# Altium PCB mother_asserv_robinch.PcbDoc
Units mm, origin at the board's own origin, x right, y up, seen from the top; angles counter-clockwise.
Board outline 79.38 x 49.78 mm, 2 copper layers (Top Layer, Bottom Layer); 57 components, 47 nets, 223 pads, 6 vias.
Unrouted connection lines stored in the file: 5.
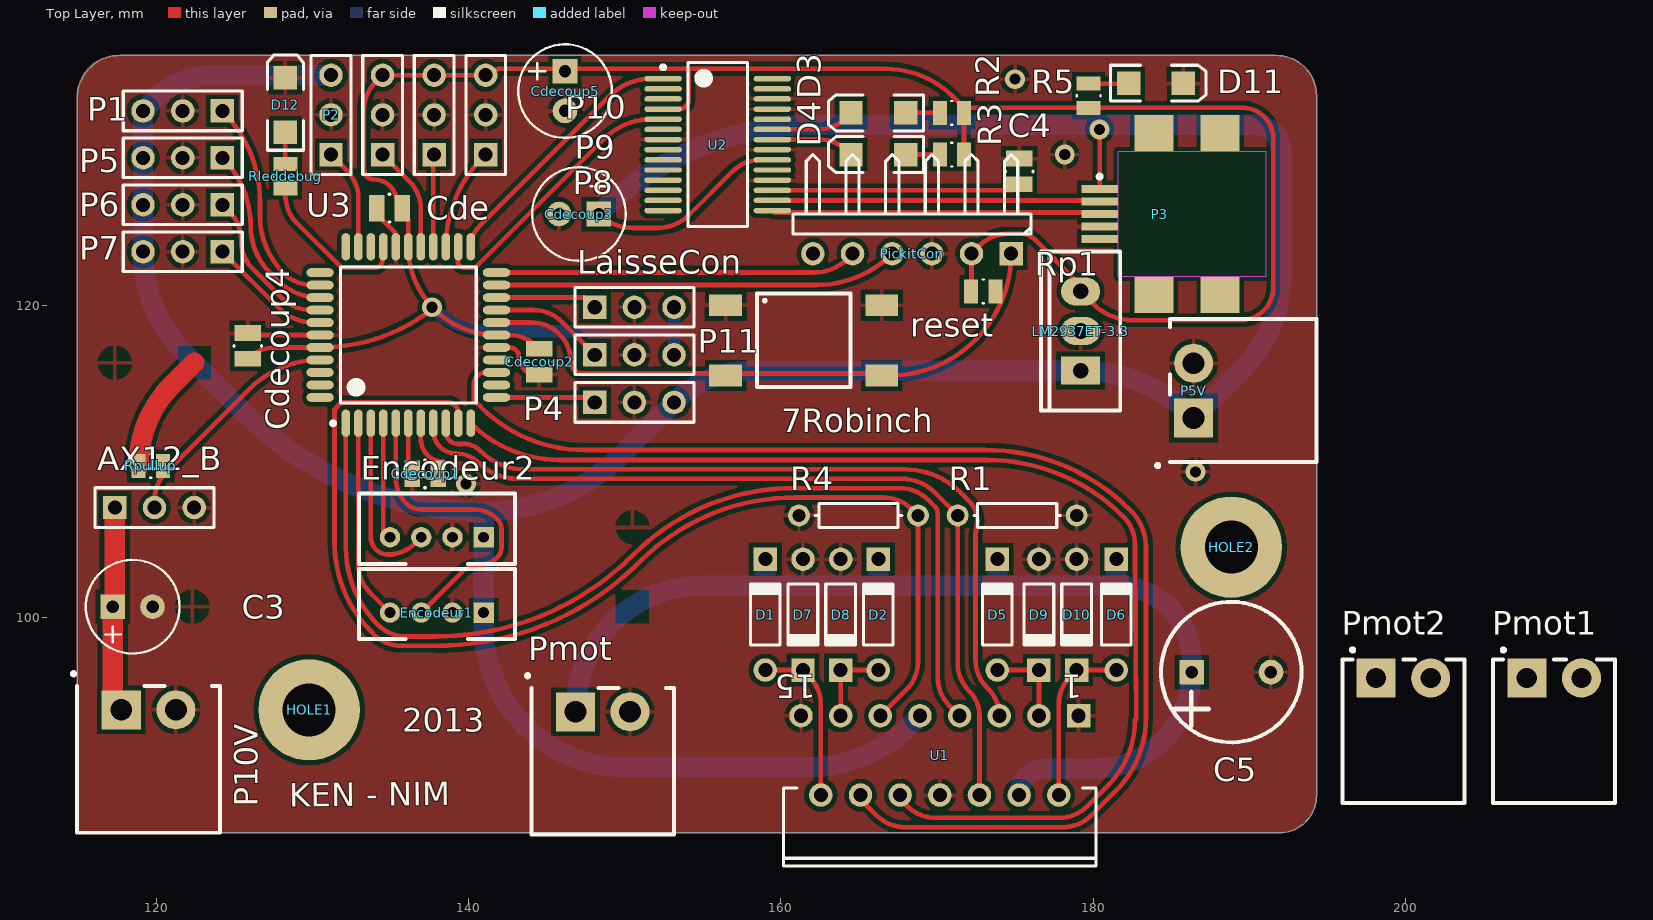
[diagram p0: Top Layer view]
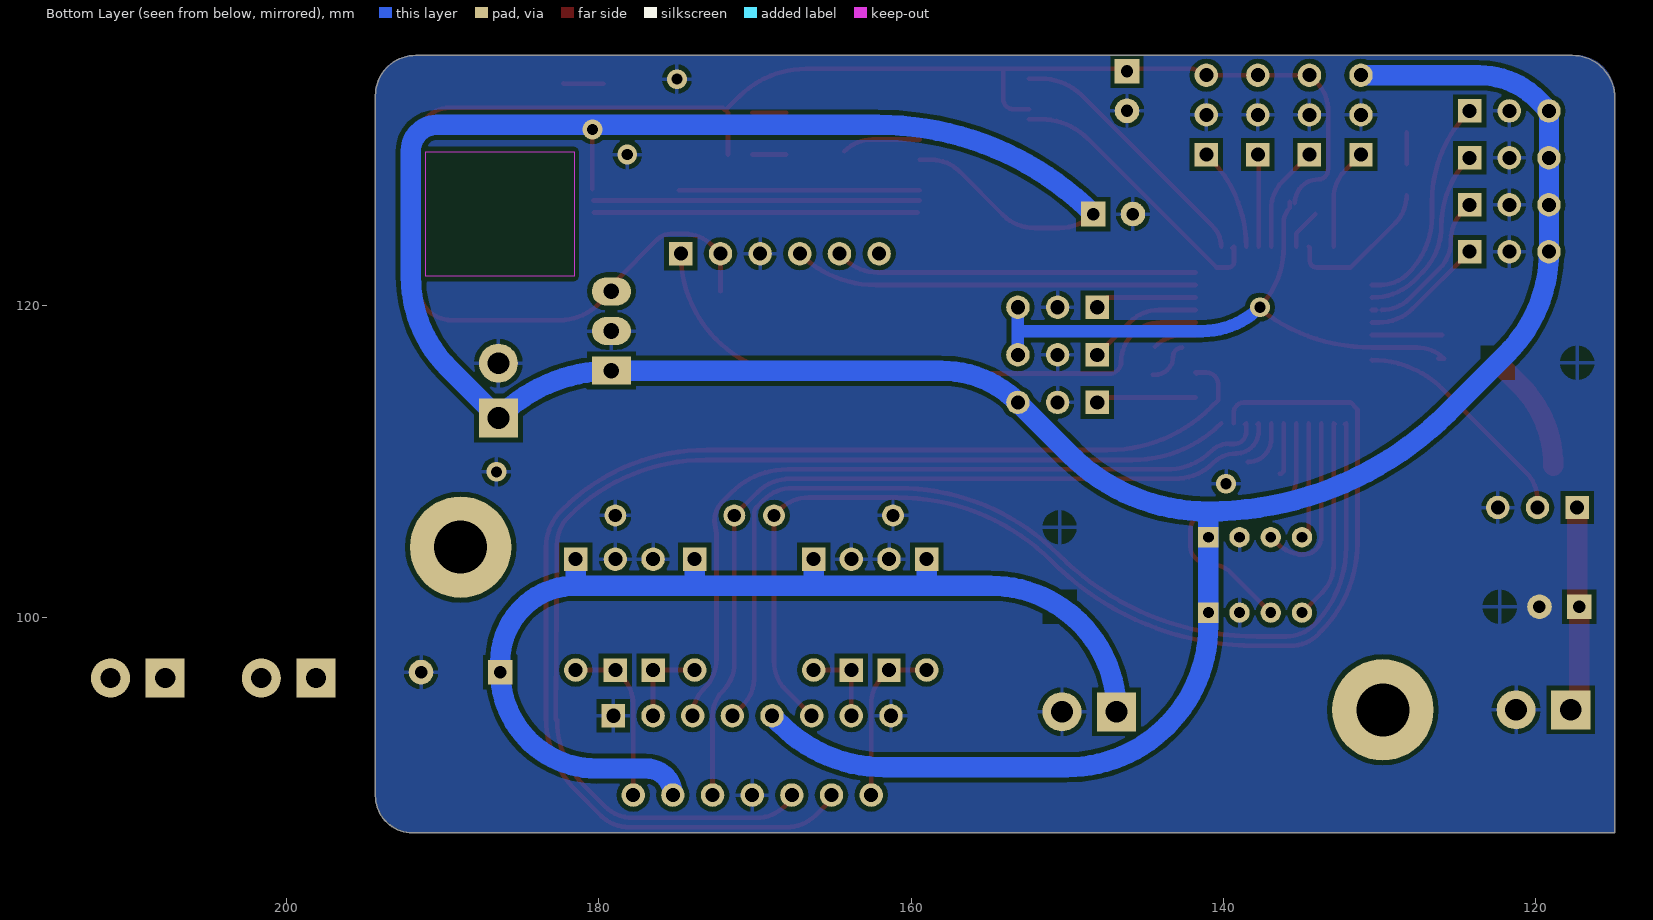
[diagram p1: Bottom Layer view, seen from below]

## Layer stack, top to bottom
Top Layer: signal copper 0.0356
Dielectric: dielectric 0.32, FR-4, Dk 4.8
Bottom Layer: signal copper 0.0356

## Board outline
114.935,86.233 191.929,86.233 ccw(c191.929,88.614) 194.31,88.614 194.31,133.43 ccw(c191.723,133.43) 191.723,136.017 117.664,136.017 ccw(c117.664,133.288) 114.935,133.288

## Design rules (kind name [scope] priority, off if disabled: settings)
Clearance [All] p1: gap=0.3
HoleSize [All] p1: absolutevalues=TRUE maxlimit=25.4 minlimit=0.025 maxpercent=80.000 minpercent=20.000
PolygonConnect [All] p1: connectstyle=Relief reliefconductorwidth=0.254 reliefentries=4 polygonreliefangle="90 Angle"
RoomDefinition motherpetit [InComponentClass('motherpetit')] p1: confinementstyle=ConfineIn formatcopy=TRUE lockcomponents=FALSE outline 0,0 50.8,0 50.8,25.4 0,25.4
RoomDefinition Hbridge [InComponentClass('Hbridge')] p2: confinementstyle=ConfineIn formatcopy=TRUE lockcomponents=FALSE outline 195.453,87.884 213.868,87.884 213.868,100.838 195.453,100.838
RoutingVias [All] p1: holewidth=0.6 width=1 viastyle="Through Hole" minholewidth=0.711 minwidth=1.27 maxholewidth=0.711 maxwidth=1.27
SilkscreenOverComponentPads [All] p1: minsilkscreentomaskgap=0.254
SolderMaskExpansion [All] p1: expansion=0.102
Width [All] p1: maxlimit=1.3 minlimit=0.3 preferedwidth=1.3 toplayer_prefwidth=0.3 minimp=50.000000 maximp=50.000000 favimp=50.000000
26 further rules are at their usual default settings.

## Classes and differential pairs
component class motherpetit: AX12_B C4 Cde Cdecoup1 Cdecoup2 Cdecoup3 Cdecoup4 Cdecoup5 D3 D4 D11 D12 Encodeur1 Encodeur2 HOLE1 HOLE2 LaisseCon LM2937ET-3.3 P1 P2 P3 P4 P5 P6 P7 P8 P9 P10 P11 PickitCon R2 R3 R5 reset Rleddebug Rp1 Rpullup U2 U3
component class Hbridge: C3 C5 D1 D2 D5 D6 D7 D8 D9 D10 P5V P10V Pmot Pmot1 Pmot2 R1 R4 U1

## Components (designator, comment, footprint, x,y, rotation, side; value= is the part's Value field where it differs from the comment)
AX12_B "Header 3" HDR1X3 117.348,107.061 r0 top
C3 "CAP Pol" RB.1/.3 117.221,100.711 r180 top
C4 "" C0805C 175.26,129.413 r270 top
C5 "CAP Pol" RB.2/.4 186.309,96.52 r180 top
Cde "CAP" C0805C 134.112,126.238 r0 top
Cdecoup1 "CAP" C0805C 136.398,109.22 r0 top
Cdecoup2 "CAP" C0805C 144.526,115.57 r90 top
Cdecoup3 "CAP Pol" RB.1/.3 148.336,125.857 r0 top
Cdecoup4 "CAP" C0805C 125.857,118.237 r270 top
Cdecoup5 "CAP Pol" RB.1/.3 146.177,135.001 r90 top
D1 "Diode 1N914" DO-35 159.004,100.203 r90 top
D2 "Diode 1N914" DO-35 166.243,100.203 r90 top
D3 "LED2" LED1206Y 166.243,132.334 r180 top
D4 "LED2" LED1206Y 166.243,129.667 r180 top
D5 "Diode 1N914" DO-35 173.863,100.203 r90 top
D6 "Diode 1N914" DO-35 181.483,100.203 r90 top
D7 "Diode 1N914" DO-35 161.417,100.203 r270 top
D8 "Diode 1N914" DO-35 163.83,100.203 r270 top
D9 "Diode 1N914" DO-35 176.53,100.203 r270 top
D10 "Diode 1N914" DO-35 178.943,100.203 r270 top
D11 "LED" LED1206R 184.023,134.239 r0 top
D12 "LED" LED1206G 128.27,132.842 r90 top
Encodeur1 "JST" B4B-PH-K-S 140.97,100.33 r180 top
Encodeur2 "JST" B4B-PH-K-S 140.97,105.156 r180 top
HOLE1 "Hole" SCREW 129.794,94.107 r0 top
HOLE2 "Hole" SCREW 188.849,104.521 r0 top
LaisseCon "Header 3" HDR1X3 148.082,119.888 r0 top
LM2937ET-3.3 "LM2937ET-3.3" TO-220V 179.197,115.824 r180 top
P1 "Header 3" HDR1X3 124.233,132.461 r180 top
P2 "Header 3" HDR1X3 131.191,129.667 r90 top
P3 "USB" USB/SM0.8-4H5 184.277,125.857 r0 top
P4 "Header 3" HDR1X3 148.082,113.792 r0 top
P5 "Header 3" HDR1X3 124.233,129.455 r180 top
P5V "Header 2" "Bornier male coude 2 voies" 186.436,114.554 r90 top
P6 "Header 3" HDR1X3 124.233,126.45 r180 top
P7 "Header 3" HDR1X3 124.233,123.444 r180 top
P8 "Header 3" HDR1X3 141.097,129.667 r90 top
P9 "Header 3" HDR1X3 137.795,129.667 r90 top
P10 "Header 3" HDR1X3 134.493,129.667 r90 top
P10V "Header 2" "Bornier male coude 2 voies" 119.507,94.107 r0 top
P11 "Header 3" HDR1X3 148.082,116.84 r0 top
PickitCon "PICkit" HDR1X6H 174.752,123.317 r180 top
Pmot "Header 2" "Bornier male coude 2 voies" 148.59,93.98 r0 top
Pmot1 "Header 2" TERM2W-3.5 207.772,96.139 r0 top
Pmot2 "Header 2" TERM2W-3.5 198.12,96.139 r0 top
R1 "Res1" AXIAL-0.3 175.133,106.553 r180 top
R2 "" C0805R 170.18,132.334 r0 top
R3 "" C0805R 170.18,129.667 r0 top
R4 "Res1" AXIAL-0.3 164.973,106.553 r0 top
R5 "RES" C0805R 179.705,132.657 r90 top
reset "SPST-NO" SPST-NO 156.464,120.015 r270 top
Rleddebug "" C0805R 128.27,127.508 r90 top
Rp1 "RES" C0805R 173.736,120.904 r180 top
Rpullup "RES" C0805R 118.872,109.728 r0 top
U1 "L298N" Multiwatt15V 170.18,91.186 r180 top
U2 "FT232RL" SSOP-28_M 155.956,130.302 r0 top
U3 "dsPIC33FJ64MC804-I/PT" TQFP-PT44_N 136.144,118.11 r90 top

## Footprints (in the part's own frame and the unit in brackets; to place one, negate y for a bottom-side part, rotate by r counter-clockwise, add the part's x,y. Pads: shape width x height; smd on the part's side, far side on the other; paste and mask are expansions set on the pad)
AXIAL-0.3 [mm] "Axial Device, Thru-Hole; 2 Leads; 0.3 in Pin Spacing"
  round 1.4 hole 0.85: 1(-3.81,0) 2(3.81,0)
  silkscreen extent -2.77,-0.76 2.77,0.76
B4B-PH-K-S [mm] "JST Header 4 pins Straight"
  rect 1.3x1.3 hole 0.7: 1(0,0)
  round 1.3 hole 0.7: 2(2,0) 3(4,0) 4(6,0)
  silkscreen extent -2,-2.8 8,1.7, body extent -1.95,-2.8 7.95,1.7, height 6
"Bornier male coude 2 voies" [mm] "Bornier male coude 2 voies 12A. Pas 5mm (model : CTB9350/2A) -- 3D FAUSSE"
  rect 2.5x2.5 hole 1.4: 1(-1.75,0)
  round 2.5 hole 1.4: 2(1.75,0)
  silkscreen extent -4.9,-7.87 4.57,2.41, body extent -4.2,-7.93 4.2,1.27, height 7.25
C0805C [mm]
  rect 1x1.7 smd: 1(0,0) 2(1.65,0)
  silkscreen extent 0.8,-0.89 0.85,0.89, body extent -0.21,-0.61 1.79,0.64, height 0.78
C0805R [mm]
  rect 0.9x1.55 smd: 1(0,0) 2(1.55,0)
  silkscreen extent 0.73,-0.76 0.81,0.76, body extent -0.24,-0.62 1.76,0.63, height 0.78
DO-35 [mm] "Diode, Axial; Body 3.8 x 1.9 mm (LxDia. max), Lead Dia. 0.53 mm (max)"
  round 1.5 hole 0.9: 1(-3.55,0)
  rect 1.5x1.5 hole 0.9: 2(3.55,0)
  silkscreen extent -1.95,-0.95 2.05,0.95
HDR1X3 [mm] "Connector; Header; 3 Position"
  rect 1.5x1.5 hole 0.9: 1(0,0)
  round 1.5 hole 0.9: 2(2.54,0) 3(5.08,0)
  silkscreen extent -1.27,-1.27 6.35,1.27
HDR1X6H [mm] "Connector; Header; 6 Position; Right Angle"
  rect 1.5x1.5 hole 0.9: 1(0,0)
  round 1.5 hole 0.9: 2(2.54,0) 3(5.08,0) 4(7.62,0) 5(10.16,0) 6(12.7,0)
  silkscreen extent -1.27,-6.35 13.97,-1.27
LED1206G [mm] "SMT LED; 2 Flat Leads; 3.2X1.6X1.1"
  rect 1.5x1.5 smd: 1(-1.75,0) 2(1.75,0)
  silkscreen extent -2.9,-1.15 3.2,1.15, body extent -1.6,-0.8 1.6,0.8, height 1.11
LED1206R [mm] "SMT LED; 2 Flat Leads; 3.2X1.6X1.1"
  rect 1.5x1.5 smd: 1(-1.75,0) 2(1.75,0)
  silkscreen extent -2.9,-1.15 3.2,1.15, body extent -1.6,-0.8 1.6,0.8, height 1.11
LED1206Y [mm] "SMT LED; 2 Flat Leads; 3.2X1.6X1.1"
  rect 1.5x1.5 smd: 1(-1.75,0) 2(1.75,0)
  silkscreen extent -2.9,-1.15 3.2,1.15, body extent -1.6,-0.8 1.6,0.8, height 1.11
Multiwatt15V [mm] "TO, Thru-Hole, Vertical, Heatsink Mounted; 15 Bent Staggered Leads; Pitch 1.27 mm"
  rect 1.5x1.5 hole 0.9: 1(-8.89,-2.54)
  round 1.5 hole 0.9: 2(-7.62,2.54) 3(-6.35,-2.54) 4(-5.08,2.54) 5(-3.81,-2.54) 6(-2.54,2.54) 7(-1.27,-2.54) 8(0,2.54) 9(1.27,-2.54) 10(2.54,2.54) 11(3.81,-2.54) 12(5.08,2.54) 13(6.35,-2.54) 14(7.62,2.54) 15(8.89,-2.54)
  silkscreen extent -10,2.09 10,7.09
RB.1/.3 [mil]
  rect 62x62 hole 31.5: 1(0,0)
  round 62 hole 31.5: 2(-100,0)
  silkscreen extent -168,-118 68,118
RB.2/.4 [mil]
  rect 62x62 hole 31.5: 1(0,0)
  round 62 hole 31.5: 2(-200,0)
  silkscreen extent -277,-177 77,177, body extent -298,-194 95,200, height 650
SCREW [mm] "Mounting Hole M3"
  round 6.5 hole 3.4: 1(0,0)
  body extent -2.89,-2.52 2.89,2.52, height 10
SPST-NO [mm] "Tactile Switch SPST-NO 6x6mm"
  rect 1.4x2.1 smd: 1(0,0) 2(4.5,0) 3(4.5,10) 4(0,10)
  silkscreen extent -0.75,2 5.25,8, body extent -0.75,0.93 5.25,9.08, height 5
SSOP-28_M [mm] "SOP, 28-Leads, Body 10.2x5.3mm, Pitch 0.65mm, IPC Low Density"
  oval 2.4x0.35 smd: 1(-3.5,4.225) 2(-3.5,3.575) 3(-3.5,2.925) 4(-3.5,2.275) 5(-3.5,1.625) 6(-3.5,0.975) 7(-3.5,0.325) 8(-3.5,-0.325) 9(-3.5,-0.975) 10(-3.5,-1.625) 11(-3.5,-2.275) 12(-3.5,-2.925) 13(-3.5,-3.575) 14(-3.5,-4.225) 15(3.5,-4.225) 16(3.5,-3.575) 17(3.5,-2.925) 18(3.5,-2.275) 19(3.5,-1.625) 20(3.5,-0.975) 21(3.5,-0.325) 22(3.5,0.325) 23(3.5,0.975) 24(3.5,1.625) 25(3.5,2.275) 26(3.5,2.925) 27(3.5,3.575) 28(3.5,4.225)
  silkscreen extent -3.62,-5.25 1.9,5.25, body extent -2.8,-5.25 2.8,5.25, height 2
TERM2W-3.5 [mm] "Horizontal Terminal Block, 2 ways, 3.5mm; Model 20.155MH/2"
  rect 2.5x2.5 hole 1.3: 1(0,0)
  round 2.5 hole 1.3: 2(3.5,0)
  silkscreen extent -2.15,-8 5.65,1.9, body extent -2.45,-8 5.95,1.2, height 7.25
TO-220V [mm]
  rect 2.5x1.8 hole 1: 1(0,0)
  oval 2.5x1.8 hole 1: 2(0,-2.54) 3(0,-5.08)
  silkscreen extent -2.54,-7.62 2.54,2.54
TQFP-PT44_N [mm] "Thin QFP, 44-Leads, Body 10x10mm, Pitch 0.8mm, IPC Medium Density"
  oval 1.75x0.55 smd: 1(-5.65,4) 2(-5.65,3.2) 3(-5.65,2.4) 4(-5.65,1.6) 5(-5.65,0.8) 6(-5.65,0) 7(-5.65,-0.8) 8(-5.65,-1.6) 9(-5.65,-2.4) 10(-5.65,-3.2) 11(-5.65,-4) 23(5.65,-4) 24(5.65,-3.2) 25(5.65,-2.4) 26(5.65,-1.6) 27(5.65,-0.8) 28(5.65,0) 29(5.65,0.8) 30(5.65,1.6) 31(5.65,2.4) 32(5.65,3.2) 33(5.65,4)
  oval 0.55x1.75 smd: 12(-4,-5.65) 13(-3.2,-5.65) 14(-2.4,-5.65) 15(-1.6,-5.65) 16(-0.8,-5.65) 17(0,-5.65) 18(0.8,-5.65) 19(1.6,-5.65) 20(2.4,-5.65) 21(3.2,-5.65) 22(4,-5.65) 34(4,5.65) 35(3.2,5.65) 36(2.4,5.65) 37(1.6,5.65) 38(0.8,5.65) 39(0,5.65) 40(-0.8,5.65) 41(-1.6,5.65) 42(-2.4,5.65) 43(-3.2,5.65) 44(-4,5.65)
  silkscreen extent -5.77,-4.35 4.35,4.95, body extent -5,-5 5,5, height 1.2
USB/SM0.8-4H5 [mm] "Connector; USB Mini-B, Sinking Type, SM; 5 Position; Right Angle"
  rect 2.35x0.5 smd: 1(-3.862,1.6) 2(-3.862,0.8) 3(-3.862,0) 4(-3.862,-0.8) 5(-3.862,-1.6)
  rect 2.5x2.35 smd: MH1(-0.387,-5.175) MH2(3.863,-5.175) MH3(3.863,5.175) MH4(-0.387,5.175)
  Keep-Out Layer region: -2.687,-4 6.813,-4 6.813,4 -2.687,4
  silkscreen extent -3.99,2.28 -3.74,2.52, body extent -1.8,-3.84 6.8,3.86, height 0.65

## Part data
AX12_B LaisseCon P1 P2 P4 P5 P6 P7 P8 P9 P10 P11: "Header, 3-Pin"
C3 C5 Cdecoup3 Cdecoup5: "Polarized Capacitor"
C4: library part "Cap Semi", "Capacitor (Semiconductor SIM Model)"
Cde Cdecoup1 Cdecoup2 Cdecoup4: "Capacitor"
D1 D2 D5 D6 D7 D8 D9 D10: "High Conductance Fast Diode"
D3 D4: "Typical RED, GREEN, YELLOW, AMBER GaAs LED"
D11 D12: "Typical LED"
Encodeur1 Encodeur2: library part "Header 4", "Header, 4-Pin"
HOLE1 HOLE2: "Mounting Hole for screws"
LM2937ET-3.3: "3.3V linear Regulator"
P3: library part "USB Con", "USB Connector"
P5V P10V Pmot Pmot1 Pmot2: "Header, 2-Pin"
PickitCon: library part "Header ICSP", "Header, 6-Pin, Right Angle"
R1 R4 R5 Rp1 Rpullup: "Resistor"
R2 R3 Rleddebug: library part Res3, "Resistor"
reset: "Tactile Switch 7.3mm, SMD"
U1: "Dual Full Bridge Driver"
U2: "USB UART Asynchronous Serial Data Transfer Chip, SSOP-28, Tube"
U3: "High-Performance 16-bit Digital Signal Controller, 64 KB Flash, 16 KB RAM, 44-Pin TQFP, Industrial Temperature"

## Via types
v1: diameter 1.27, hole 0.711, Top Layer to Bottom Layer, 6 vias

## Nets (pads, with @x,y where several pads share a name; then routed paths per layer and width w, separated by ;. In a path a pad name is that pad's centre, name@x,y a point inside that pad or via, vN(x,y) a via of type N, cw(c..) or ccw(c..) an arc to the next point about the centre after c; other vN are vias at no path point)
3V3: Cde.2 Cdecoup2.2 Cdecoup4.2 Cdecoup5.1 LaisseCon.3 LM2937ET-3.3.3 P8.3 P9.3 P10.3 P11.3 PickitCon.2 R2.2 R3.2 R5.1 Rp1.2 U2.4 U3.17 U3.28 U3.40 | length 157.4
  Top Layer w0.3: Cdecoup4.2@126.239,116.587 Cdecoup4.2 cw(c127.602,114.842) 127.602,117.31 U3.40 ; U3.40@130.471,117.287 U3.40 ; 133.293,128.689 133.293,132.495 cw(c135.833,132.495) 134.037,134.291 P10.3 P9.3 P8.3 cw(c142.075,133.769) 142.075,135.152 154.178,135.152 ; 133.305,128.689 ccw(c133.919,128.689) 133.919,128.075 cw(c133.919,126.566) Cde.2@135.428,126.566 ; Cde.2@135.762,126.634 Cde.2 cw(c134.84,125.316) 136.144,125.316 U3.28 ccw(c141.794,123.76) U3.17 142.584,118.11 cw(c142.584,115.57) Cdecoup2.2@144.38,117.366 ; v1@137.684,119.777 cw(c130.494,129.019) U3.40 ; U2.4 153.46,132.577 ccw(c153.46,133.223) 154.106,133.223 154.106,135.08 cw(c154.178,135.08) 154.178,135.152 ; R3.2 R2.2 ; Rp1.2 ccw(c172.186,120.93) 172.212,120.93 PickitCon.2 172.738,123.843 cw(c174.534,122.047) 174.534,124.587 175.387,124.587 cw(c175.387,123.361) 176.254,124.228 178.928,121.554 cw(c178.277,120.904) LM2937ET-3.3.3 179.999,120.102 ccw(c182.523,122.627) 182.523,119.057 189.432,119.057 ccw(c189.432,121.165) 191.54,121.165 191.54,130.693 ccw(c189.576,130.693) 189.576,132.657 172.053,132.657 171.892,132.496 171.001,133.386 ccw(c166.737,129.122) 166.737,135.152 154.178,135.152
  Bottom Layer w0.8: v1(137.668,119.888) ccw(c141.347,123.567) 141.347,118.364 153.162,118.364 ; P11.3 153.162,118.364 ; LaisseCon.3 153.162,118.364
5V: Cdecoup3.1 Encodeur1.1 Encodeur2.1 LM2937ET-3.3.1 P1.3 P2.3 P3.1 P4.3 P5.3 P5V.1 P6.3 P7.3 Rpullup.1 U1.9 U2.20 | length 234.6
  Top Layer w0.3: Cdecoup3.1 ccw(c150.482,128.003) 150.482,124.968 152.118,124.968 ccw(c152.118,127.796) 154.117,125.796 156.904,128.583 cw(c158.7,126.787) 158.7,129.327 U2.20 ; P3.1 v1(180.415,131.272)
  Top Layer w1.3: Rpullup.1 cw(c126.231,109.728) 121.027,114.931 122.428,116.332
  Bottom Layer w0.3: v1(180.415,131.272) 180.415,131.572 180.415,131.631 cw(c180.593,131.631) v1@180.467,131.757
  Bottom Layer w1.3: P2.3 123.643,134.747 ccw(c123.643,129.425) 119.88,133.188 P1.3 P5.3 P6.3 P7.3 ccw(c128.416,123.444) 121.866,116.894 122.428,116.332 125.577,113.183 ccw(c140.97,128.576) 140.97,106.807 ; Cdecoup3.1 cw(c162.133,112.06) 162.133,131.572 v1@180.415,131.572 ; U1.9 168.375,93.191 cw(c161.695,99.871) 161.695,90.424 150.037,90.424 cw(c150.037,99.491) 140.97,99.491 Encodeur1.1 Encodeur2.1 140.97,106.807 ; 182.753,131.572 v1@180.415,131.572 ; 140.97,106.807 ccw(c140.97,119.378) 149.859,110.489 P4.3 cw(c158.068,108.886) 158.068,115.824 LM2937ET-3.3.1 cw(c179.197,105.638) 186.399,112.841 P5V.1 189.617,115.985 ccw(c183.767,121.835) 192.04,121.835 192.04,129.898 ccw(c190.366,129.898) 190.366,131.572 v1@180.415,131.572
10V: AX12_B.1 C3.1 P10V.1 | length 13
  Top Layer w1.3: C3.1 117.221,95.401 ccw(c119.051,95.401) P10V.1 ; C3.1@117.348,100.838 AX12_B.1
A1: Encodeur1.3 U3.5 | length 20.2
  Top Layer w0.3: U3.5 135.344,108.94 ccw(c137.642,108.94) 136.017,107.315 ccw(c136.937,108.235) 136.937,106.934 140.326,106.934 cw(c140.326,104.766) 141.859,106.299 cw(c141.246,105.686) 142.113,105.686 142.113,104.499 cw(c141.246,104.499) 141.859,103.886 cw(c140.633,105.112) 140.633,103.378 ccw(c140.633,101.894) 139.583,102.943 Encodeur1.3
A2: Encodeur2.3 U3.3 | length 11.5
  Top Layer w0.3: U3.3 133.744,105.156 ccw(c134.844,105.156) 134.844,104.056 135.219,104.056 ; 135.219,104.085 ccw(c134.844,106.533) 136.595,104.781 Encodeur2.3
B1: Encodeur1.4 U3.2 | length 12.9
  Top Layer w0.3: U3.2@132.889,112.405 U3.2 132.944,103.408 ccw(c135.484,103.408) 133.688,101.612 Encodeur1.4
B2: Encodeur2.4 U3.4 | length 7.5
  Top Layer w0.3: U3.4 134.544,105.455 ccw(c134.843,105.455) Encodeur2.4@134.843,105.156
DIR11: U1.5 U3.9 | length 50
  Top Layer w0.3: U3.9@138.619,112.385 U3.9 138.544,111.908 ccw(c139.317,111.908) 139.317,111.135 139.628,111.135 ccw(c139.628,111.173) 139.656,111.146 cw(c139.656,109.576) 140.766,110.686 ccw(c143.623,113.544) 143.623,109.503 167.933,109.503 cw(c167.933,104.456) 171.502,108.025 172.085,107.442 cw(c170.859,106.216) 172.593,106.216 172.466,105.357 172.466,97.318 ccw(c175.006,97.318) 173.21,95.522 173.268,95.464 cw(c171.525,93.721) U1.5@173.99,93.721
DIR12: U1.7 U3.1 | length 66.3
  Top Layer w0.3: U3.1@132.219,112.385 U3.1 132.144,104.5 ccw(c139.145,104.5) 134.194,99.55 ccw(c135.99,101.346) 135.99,98.806 137.895,98.806 ccw(c137.895,116.752) 150.585,104.062 cw(c160.823,93.824) 160.823,108.303 167.632,108.303 cw(c167.632,105.763) 169.428,107.559 169.873,107.114 cw(c169.44,106.68) 170.053,106.68 170.053,96.17 ccw(c172.593,96.17) 170.797,94.374 U1.7@171.45,93.721
DIR21: U1.10 U3.11 | length 75.7
  Top Layer w0.3: U3.11 ccw(c145.82,118.136) 145.82,110.109 173.173,110.109 cw(c173.173,97.712) 181.939,106.478 cw(c180.143,104.682) 182.683,104.682 182.753,93.472 ; U1.10@167.64,88.387 168.096,87.931 ccw(c169.892,89.727) 169.892,87.187 177.829,87.187 ccw(c177.829,89.727) 179.625,87.931 180.926,89.232 ccw(c176.685,93.473) 182.683,93.473
DIR22: U1.12 U3.14 | length 83.6
  Top Layer w0.3: U3.14@141.719,115.635 U3.14 141.11,115.71 ccw(c141.11,114.935) 140.335,114.935 140.335,113.944 140.8,113.479 ccw(c147.403,120.082) 147.403,110.744 173.13,110.744 cw(c173.13,97.727) 182.334,106.932 182.436,106.829 cw(c180.139,104.532) 183.388,104.532 183.388,93.599 ; U1.12@165.1,88.387 166.156,87.331 ccw(c167.952,89.127) 167.952,86.587 178.068,86.587 ccw(c178.068,89.15) 179.88,87.338 181.429,88.887 ccw(c176.7,93.616) 183.388,93.616
DM: P3.2 U2.16 | length 20.9
  Top Layer w0.3: U2.16 P3.2@180.345,126.727
DP: P3.3 U2.15 | length 20.7
  Top Layer w0.3: U2.15@159.576,125.957 P3.3@180.315,125.957
GND: AX12_B.3 C3.2 C4.1 C5.2 Cde.1 Cdecoup1.1 Cdecoup2.1 Cdecoup3.2 Cdecoup4.1 Cdecoup5.2 D7.1 D8.1 D9.1 D10.1 D11.2 D12.2 Encodeur1.2 Encodeur2.2 LaisseCon.2 LM2937ET-3.3.2 P1.2 P2.2 P3.4 P4.2 P5.2 P5V.2 P6.2 P7.2 P8.2 P9.2 P10.2 P10V.2 P11.2 PickitCon.3 Pmot.2 R1.1 R4.1 reset.1 reset.4 U1.1 U1.8 U1.15 U2.7 U2.18 U2.21 U2.25 U2.26 U3.6 U3.16 U3.29 U3.39 | length 13.6
  Top Layer w0.3: Cdecoup4.1@125.984,118.11 U3.39 ; Cde.1@134.112,125.857 135.344,124.625 U3.29 ; U3.6 136.144,109.474 ccw(c136.398,109.474) Cdecoup1.1 ; U3.16@142.629,117.31 cw(c142.629,116.713) 143.226,116.713 ccw(c144.369,116.713) Cdecoup2.1@144.369,115.57 ; Cdecoup2.1@144.145,115.57 Cdecoup2.1@144.369,115.57 ; Cdecoup2.1 Cdecoup2.1@144.369,115.57
  other v1: 139.827,108.585 186.563,109.347 178.181,129.667 175.006,134.493
IO1_5V: P2.1 U3.32 | length 6.5
  Top Layer w0.3: P2.1 132.2,128.658 cw(c130.404,126.862) 132.944,126.862 U3.32
IO2_5V: P1.1 U3.35 | length 14.1
  Top Layer w0.3: P1.1 cw(c118.402,126.63) 126.648,126.63 126.648,125.725 ccw(c131.839,125.725) 128.169,122.054 ccw(c129.965,123.85) U3.35@129.965,121.31 ; U3.35@129.896,121.31 U3.35@129.965,121.31 ; U3.35 U3.35@129.965,121.31
IO3_5V: P4.1 U3.12 | length 6.4
  Top Layer w0.3: U3.12 147.764,114.11 P4.1
IO4_5V: P5.1 U3.36 | length 11.9
  Top Layer w0.3: P5.1 cw(c119.851,125.073) 126.048,125.073 ccw(c130.266,125.073) 127.284,122.09 127.753,121.621 ccw(c130.436,124.304) 130.436,120.51 U3.36
IO5_5V: P6.1 U3.37 | length 9.6
  Top Layer w0.3: P6.1 124.705,125.978 cw(c122.946,124.22) 125.433,124.22 125.433,124.145 ccw(c127.973,124.145) 126.177,122.349 128.072,120.454 ccw(c129.868,122.25) U3.37@129.868,119.71 ; U3.37@130.21,119.71 U3.37
IO6_5V: P7.1 U3.38 | length 8
  Top Layer w0.3: P7.1 127.871,119.806 ccw(c130.034,121.969) 130.034,118.91 U3.38
IO_AN0: P11.1 U3.19 | length 7.4
  Top Layer w0.3: U3.19 144.16,119.71 cw(c144.16,117.17) 145.956,118.966 P11.1
IO_AN6: P8.1 U3.25 | length 6.6
  Top Layer w0.3: U3.25 cw(c146.641,123.76) 140.916,129.486 P8.1
IO_AN7: P9.1 U3.26 | length 5.9
  Top Layer w0.3: U3.26 P9.1@137.744,129.667
IO_AN8: P10.1 U3.27 | length 6.8
  Top Layer w0.3: P10.1 136.2,127.96 cw(c134.404,126.164) 136.944,126.164 U3.27
LAISSE: LaisseCon.1 U3.20 | length 6.5
  Top Layer w0.3: U3.20 147.46,120.51 LaisseCon.1
MCLR: PickitCon.1 reset.2 reset.3 Rp1.1 U3.18 | length 39.3
  Top Layer w0.3: U3.18 144.018,118.91 cw(c144.018,116.37) 146.558,116.37 ccw(c147.288,116.37) 147.288,115.64 reset.3@166.464,115.64 ; reset.3 166.95,115.515 ccw(c166.95,123.317) PickitCon.1
NetC4_2: C4.2 U2.17 | length 15.4
  Top Layer w0.3: U2.17 C4.2@174.874,127.377
NetCdecoup1_2: Cdecoup1.2 U3.7 | length 3.3
  Top Layer w0.3: U3.7 136.944,111.462 ccw(c138.43,111.462) Cdecoup1.2@138.43,109.976
NetD1_1: D1.1 D7.2 Pmot2.2 U1.14 | length 10.2
  Top Layer w0.3: D1.1 D7.2 ; D7.2@161.816,96.254 cw(c160.02,94.458) 162.56,94.458 U1.14
NetD2_1: D2.1 D8.2 Pmot2.1 U1.13 | length 5.3
  Top Layer w0.3: U1.13@163.83,93.721 D8.2 D2.1
NetD3_1: D3.1 R2.1 | length 2.2
  Top Layer w0.3: D3.1 R2.1
NetD4_1: D4.1 R3.1 | length 2.2
  Top Layer w0.3: D4.1 R3.1
NetD5_1: D5.1 D9.2 Pmot1.2 U1.3 | length 5.6
  Top Layer w0.3: D5.1 D9.2 U1.3@176.53,93.721
NetD6_1: D6.1 D10.2 Pmot1.1 U1.2 | length 10.3
  Top Layer w0.3: U1.2 177.8,94.458 cw(c180.34,94.458) D10.2@178.544,96.254 ; D10.2 D6.1
NetD11_1: D11.1 R5.2 | length 2.6
  Top Layer w0.3: R5.2 182.273,134.207 D11.1
NetD12_1: D12.1 Rleddebug.2 | length 2
  Top Layer w0.3: Rleddebug.2 D12.1
NetRleddebug_1: Rleddebug.1 U3.30 | length 9.8
  Top Layer w0.3: Rleddebug.1@128.27,127.061 ccw(c130.81,127.061) 129.014,125.265 131.844,122.435 134.044,122.435 ccw(c134.044,122.86) 134.469,122.86 134.469,123.685 U3.30
PGEC: PickitCon.5 U3.22 | length 23.2
  Top Layer w0.3: U3.22 162.141,122.11 ccw(c162.141,125.113) 164.265,122.99 PickitCon.5
PGED: PickitCon.4 U3.21 | length 25.9
  Top Layer w0.3: U3.21 162.287,121.31 ccw(c162.287,128.162) PickitCon.4
PWM1H2: R4.2 U1.11 U3.10 | length 75.8
  Top Layer w0.3: 131.851,113.785 138.684,113.785 cw(c138.684,113.125) 139.344,113.125 U3.10 ; 131.851,113.792 131.419,113.36 131.419,104.778 ccw(c139.388,104.778) 133.753,99.143 133.864,99.032 ; 133.913,98.95 ccw(c135.709,100.746) 135.709,98.206 137.963,98.206 ccw(c137.963,116.587) 150.961,103.59 cw(c160.891,93.659) 160.891,107.703 166.581,107.703 cw(c166.581,105.163) 168.377,106.959 R4.2 168.783,97.186 cw(c166.243,97.186) 168.039,95.39 U1.11@166.37,93.721
PWM1H3: R1.2 U1.6 U3.8 | length 54.6
  Top Layer w0.3: U3.8@137.819,112.385 U3.8 137.744,111.971 ccw(c139.192,111.971) 138.722,110.602 ccw(c139.192,111.971) 139.192,110.523 cw(c139.192,108.457) 140.653,109.918 ccw(c143.104,112.369) 143.104,108.903 167.729,108.903 cw(c167.729,105.9) 169.853,108.023 R1.2 171.323,97.099 ccw(c173.863,97.099) 172.067,95.303 cw(c170.49,93.726) 172.72,93.726 U1.6
RX: U2.1 U3.23 | length 17
  Top Layer w0.3: U3.23 cw(c141.986,123.76) 140.684,125.063 149.076,133.455 cw(c151.664,130.867) 151.664,134.527 U2.1
RXLED: D3.2 U2.23 | length 4.9
  Top Layer w0.3: U2.23 162.384,131.277 ccw(c162.384,133.817) D3.2@164.18,132.021
TX: U2.5 U3.24 | length 18.2
  Top Layer w0.3: U3.24@139.419,123.685 U3.24 ccw(c139.344,123.735) 139.319,123.735 139.319,122.809 ccw(c139.693,122.809) 139.693,122.435 140.444,122.435 148.705,130.695 cw(c151.678,127.722) 151.678,131.927 U2.5
TXLED: D4.2 U2.22 | length 5
  Top Layer w0.3: U2.22 162.481,130.627 cw(c162.481,128.087) D4.2@164.277,129.883
UARTAX: AX12_B.2 Rpullup.2 U3.41 | length 14.6
  Top Layer w0.3: AX12_B.2@119.888,107.533 cw(c122.428,107.533) 120.632,109.329 125.917,114.614 cw(c130.494,110.037) U3.41 U3.41@130.443,116.459
VMOT: C5.1 D1.2 D2.2 D5.2 D6.2 Pmot.1 U1.4 | length 69.9
  Bottom Layer w1.3: Pmot.1 cw(c154.913,93.98) 154.913,102.053 159.004,102.053 ; D1.2 159.004,102.053 ; D2.2 166.243,102.053 ; D5.2 173.863,102.053 ; U1.4 cw(c176.96,88.646) 176.96,90.346 180.135,90.346 ccw(c180.135,96.52) C5.1 186.309,97.227 ccw(c181.483,97.227) 181.483,102.053 ; D6.2 181.483,102.053 ; 159.004,102.053 166.243,102.053 ; 166.243,102.053 173.863,102.053 ; 173.863,102.053 181.483,102.053
pads on no net: HOLE1.1 HOLE2.1 P3.5 P3.MH1 P3.MH2 P3.MH3 P3.MH4 PickitCon.6 U2.2 U2.3 U2.6 U2.8 U2.9 U2.10 U2.11 U2.12 U2.13 U2.14 U2.19 U2.24 U2.27 U2.28 U3.13 U3.15 U3.31 U3.33 U3.34 U3.42 U3.43 U3.44

## Polygon pours and split planes (outlines as drawn)
GND on Bottom Layer "Bottom Layer-No Net" (solid, pour order 4): 114.935,86.233 191.77,86.233 ccw(c191.77,88.773) 194.31,88.773 194.31,97.028 194.31,133.477 ccw(c191.77,133.477) 191.77,136.017 182.372,136.017 117.475,136.017 ccw(c117.475,133.477) 114.935,133.477 114.935,124.206 114.935,86.233
GND on Bottom Layer "Bottom Layer-No Net" (solid, pour order 5): 114.935,86.233 191.77,86.233 ccw(c191.77,88.773) 194.31,88.773 194.31,97.663 194.31,133.477 ccw(c191.77,133.477) 191.77,136.017 188.849,136.017 117.475,136.017 ccw(c117.475,133.477) 114.935,133.477 114.935,131.572 114.935,86.233
GND on Top Layer "Bottom Layer-No Net" (solid, pour order 3): 114.935,86.233 191.77,86.233 ccw(c191.77,88.773) 194.31,88.773 194.31,97.028 194.31,133.477 ccw(c191.77,133.477) 191.77,136.017 182.372,136.017 117.475,136.017 ccw(c117.475,133.477) 114.935,133.477 114.935,124.206 114.935,86.233
GND on Top Layer "Bottom Layer-No Net" (solid, pour order 6): 114.935,86.233 191.77,86.233 ccw(c191.77,88.773) 194.31,88.773 194.31,97.663 194.31,133.477 ccw(c191.77,133.477) 191.77,136.017 188.849,136.017 117.475,136.017 ccw(c117.475,133.477) 114.935,133.477 114.935,131.572 114.935,86.233

## Silkscreen, mask and mechanical layers (free items; w line width, h text height)
Top Overlay:
  text "7Robinch" at 160.02,111.887 h1.52
  text "2013" at 135.763,92.71 h1.52
  text "KEN - NIM" at 128.524,87.884 h1.52 r0.55
Mechanical 1:
  the board outline again, w0.254

## Dimensions
114.935,86.233 to 194.31,88.614 on Mechanical 1
191.929,86.233 to 191.723,136.017 on Mechanical 1

## Text inside footprints (layer, text, board x,y; h text height)
U1: Top Overlay "15" at 162.24,96.351 h1.5 r180; Top Overlay "1" at 179.3,96.351 h1.5 r180